# Altium PCB PCB1.PcbDoc
Units mm, origin at the board's own origin, x right, y up, seen from the top; angles counter-clockwise.
Board outline 72.14 x 75.57 mm, 2 copper layers (Top Layer, Bottom Layer); 21 components, 20 nets, 95 pads, 10 vias.
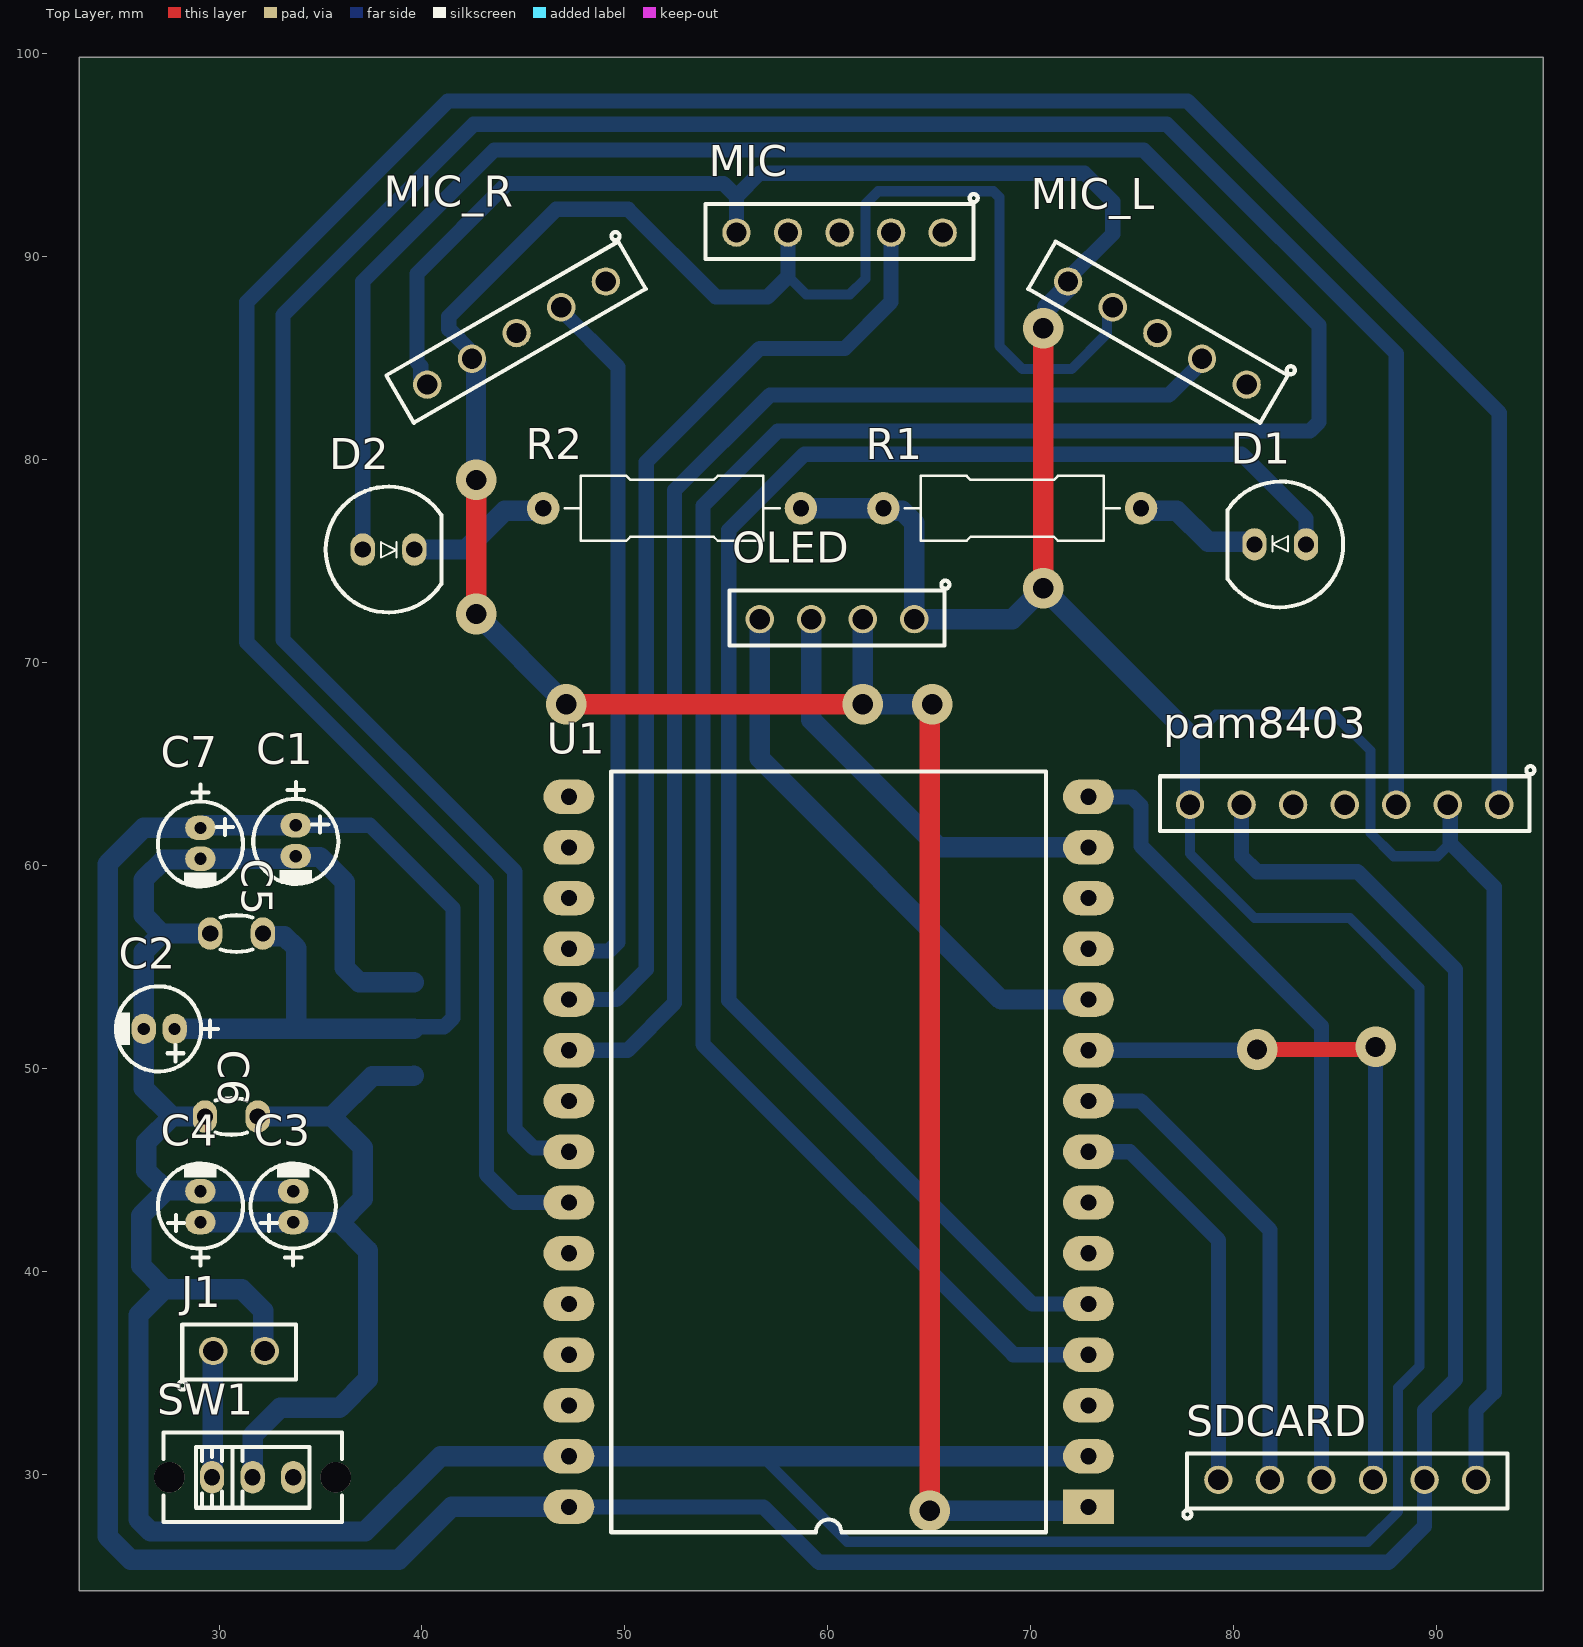
[diagram p0: Top Layer view]
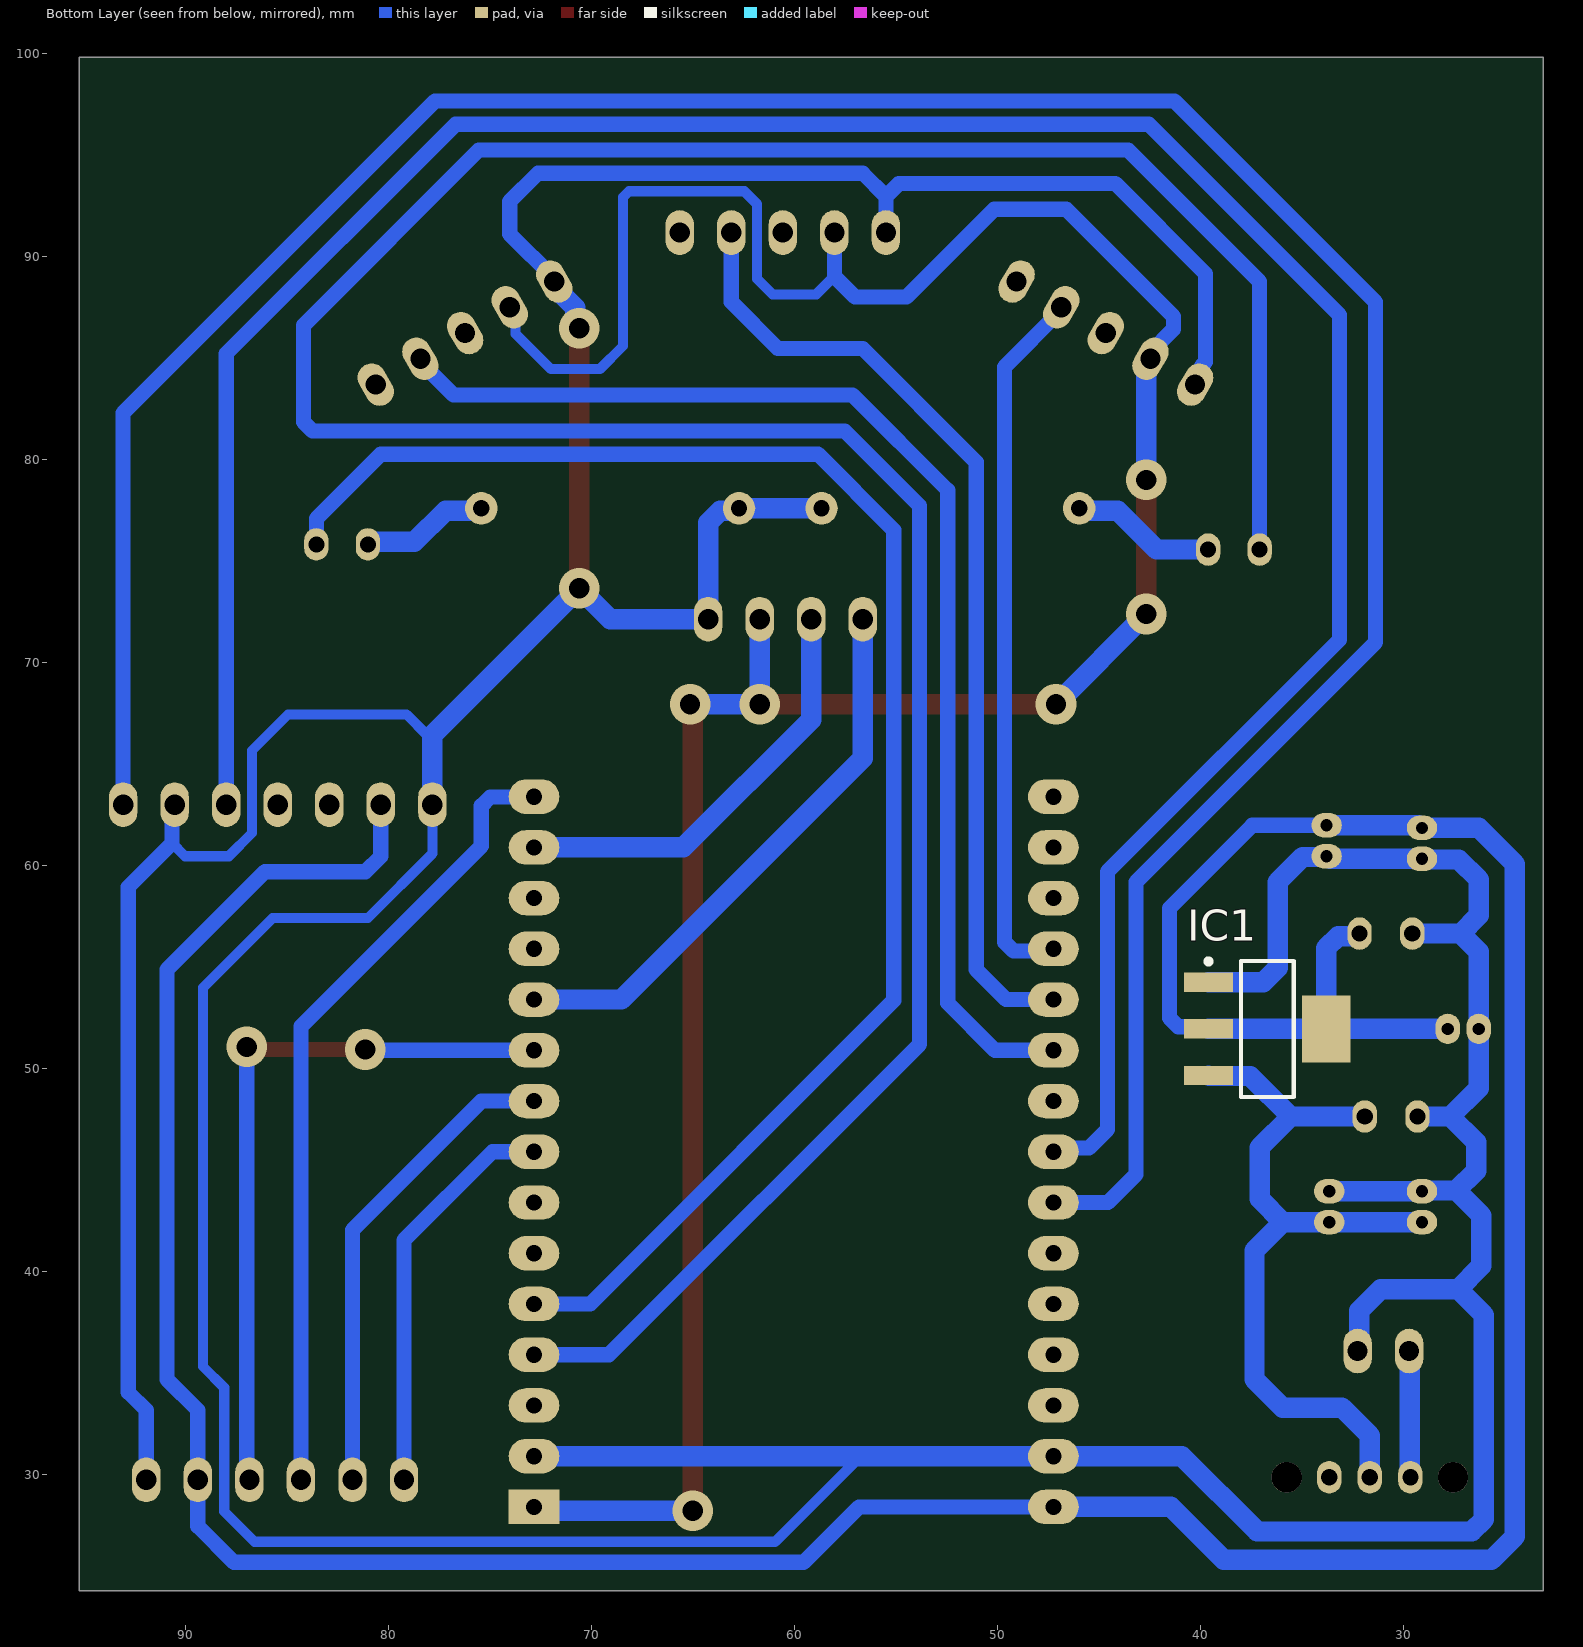
[diagram p1: Bottom Layer view, seen from below]

## Layer stack, top to bottom
Top Solder: solder mask 0.0102, Solder Resist, Dk 3.5
Top Layer: signal copper 0.0356
Dielectric 1: dielectric 0.32, FR-4, Dk 4.8
Bottom Layer: signal copper 0.0356
Bottom Solder: solder mask 0.0102, Solder Resist, Dk 3.5

## Board outline
23.114,24.257 25.527,24.257 95.25,24.257 95.25,99.822 23.114,99.822

## Design rules (kind name [scope] priority, off if disabled: settings)
Clearance [All] p1: gap=0.254 ignorepadtopadclearanceinfootprint=FALSE except(0: Arc-Hole Track-Hole SMDPad-Hole THPad-Hole Via-Hole Fill-Hole Poly-Hole Region-Hole Text-Hole)
PolygonConnect [All] p1: connectstyle=Relief reliefconductorwidth=0.254 reliefentries=4 polygonreliefangle="90 Angle" airgapwidth=0.254
RoutingVias [All] p1: holewidth=0.711 width=1.27 viastyle="Through Hole" minholewidth=0.711 minwidth=1.27 maxholewidth=0.711 maxwidth=1.27
SolderMaskExpansion [All] p1: expansion=0.102 istentingtop=FALSE
Width [All] p1: maxlimit=1 minlimit=0.5 preferedwidth=0.75
30 further rules are at their usual default settings.

## Components (designator, comment, footprint, x,y, rotation, side; value= is the part's Value field where it differs from the comment)
C1 "100uF" C_EL_4X7 33.782,61.214 r270 top
C2 "10uF" C_EL_4X7 27.051,51.943 r180 top
C3 "100uF" C_EL_4X7 33.655,43.18 r90 top
C4 "100uF" C_EL_4X7 29.083,43.18 r90 top
C5 "100nF" C_CER_D3 30.861,56.642 r0 top
C6 "100nF" C_CER_D3 30.607,47.625 r0 top
C7 "1uF" C_EL_4X7 29.083,61.087 r270 top
D1 "LED5MM_RED" LED5MM_RED 82.296,75.819 r180 top
D2 "LED5MM_GREEN" LED5MM_GRN 38.354,75.565 r0 top
IC1 "IC_AMS1117-5.0" SOT223-4N 36.703,51.943 r180 bottom
J1 "Power" HDR_F_1X2 30.988,36.068 r0 top value=HDRF2
MIC "HDRF5" HDR_F_1X5 60.579,91.186 r180 top
MIC_L "HDRF5" HDR_F_1X5 76.241,86.233 r150 top
MIC_R "HDRF5" HDR_F_1X5 44.663,86.233 r210 top
OLED "HDRF4" HDR_F_1X4 60.452,72.136 r180 top
pam8403 "HDRF7" HDR_F_1X7 85.471,62.992 r180 top
R1 "1K" "Axial 0_5W 5_0mm" 69.088,77.597 r0 top
R2 "1K" "Axial 0_5W 5_0mm" 52.324,77.597 r180 top
SDCARD "HDRF6" HDR_F_1X6 85.598,29.718 r0 top
SW1 "SlideSwitch" SWSLIDT_SPDT_S_8X4 31.655,29.845 r180 top
U1 "esp32_devkit" esp32_devkit 72.844,28.387 r180 top

## Footprints (in the part's own frame and the unit in brackets; to place one, negate y for a bottom-side part, rotate by r counter-clockwise, add the part's x,y. Pads: shape width x height; smd on the part's side, far side on the other; paste and mask are expansions set on the pad)
"Axial 0_5W 5_0mm" [mm] "Designer Abbas Basereh"
  round 1.6 hole 0.8: 1(6.35,0) 2(-6.35,0)
  silkscreen extent -5.3,-1.6 5.3,1.6, body extent -6.7,-1.65 6.7,1.65, height 4.02
C_CER_D3 [mm] "CAP, CER MULTILAYER, D:3.5mm, pitch: 2.54mm"
  oval 1.2x1.6 hole 0.8: 1(-1.3,0) 2(1.3,0)
  silkscreen extent -0.78,-0.9 0.78,0.9, body extent -1.75,-0.75 1.75,0.75, height 4
C_EL_4X7 [mm] "Cap Elec, D4.0X7.0H pitch: 1.5mm"
  oval 1.2x1.5 hole 0.6: 1(-0.762,0) 2(0.762,0)
  silkscreen extent -2.9,-2.1 2.13,2.1, body extent -2,-2 2,2, height 1
esp32_devkit [mm]
  rect 2.5x1.7 hole 0.8: 1(0,0)
  oval 2.5x1.7 hole 0.8: 2(0,-2.5) 3(0,-5) 4(0,-7.5) 5(0,-10) 6(0,-12.5) 7(0,-15) 8(0,-17.5) 9(0,-20) 10(0,-22.5) 11(0,-25) 12(0,-27.5) 13(0,-30) 14(0,-32.5) 15(0,-35) 16(25.6,-35) 17(25.6,-32.5) 18(25.6,-30) 19(25.6,-27.5) 20(25.6,-25) 21(25.6,-22.5) 22(25.6,-20) 23(25.6,-17.5) 24(25.6,-15) 25(25.6,-12.5) 26(25.6,-10) 27(25.6,-7.5) 28(25.6,-5) 29(25.6,-2.5) 30(25.6,0)
  silkscreen extent 2.08,-36.25 23.51,1.25
HDR_F_1X2 [mm] "HEADER FEMALE pitch: 2.54mm"
  round 1.4 / inner round 1.4 / far side oval 1.4x2.2 hole 1 mask+0.1: 1(-1.27,0) 2(1.27,0)
  silkscreen extent -3,-1.9 2.8,1.3, body extent -2.66,-1.3 2.67,1.2, height 8.5
HDR_F_1X4 [mm] "HEADER FEMALE pitch: 2.54mm"
  round 1.4 / inner round 1.4 / far side oval 1.4x2.2 hole 1 mask+0.1: 1(-3.81,0) 2(-1.27,0) 3(1.27,0) 4(3.81,0)
  silkscreen extent -5.54,-1.9 5.3,1.3, body extent -5.2,-1.3 5.21,1.2, height 8.5
HDR_F_1X5 [mm] "HEADER FEMALE pitch: 2.54mm"
  round 1.4 / inner round 1.4 / far side oval 1.4x2.2 hole 1 mask+0.1: 1(-5.08,0) 2(-2.54,0) 3(0,0) 4(2.54,0) 5(5.08,0)
  silkscreen extent -6.81,-1.9 6.6,1.3, body extent -6.47,-1.3 6.48,1.2, height 8.5
HDR_F_1X6 [mm] "HEADER FEMALE pitch: 2.54mm"
  round 1.4 / inner round 1.4 / far side oval 1.4x2.2 hole 1 mask+0.1: 1(-6.35,0) 2(-3.81,0) 3(-1.27,0) 4(1.27,0) 5(3.81,0) 6(6.35,0)
  silkscreen extent -8.08,-1.9 7.9,1.3, body extent -7.74,-1.3 7.75,1.2, height 8.5
HDR_F_1X7 [mm] "HEADER FEMALE pitch: 2.54mm"
  round 1.4 / inner round 1.4 / far side oval 1.4x2.2 hole 1 mask+0.1: 1(-7.62,0) 2(-5.08,0) 3(-2.54,0) 4(0,0) 5(2.54,0) 6(5.08,0) 7(7.62,0)
  silkscreen extent -9.35,-1.9 9.1,1.3, body extent -9.01,-1.3 9.02,1.2, height 8.5
LED5MM_GRN [mm] "LED 5MM THROUGH HOLE GREEN-Designer Abbas Basereh"
  oval 1.2x1.6 hole 0.8: 1(-1.27,0) 2(1.27,0)
  silkscreen extent -3.1,-3.1 2.6,3.1, body extent -3,-3 2.5,3, height 9.14
LED5MM_RED [mm] "LED 5MM THROUGH HOLE RED-Designer Abbas Basereh"
  oval 1.2x1.6 hole 0.8: 1(-1.27,0) 2(1.27,0)
  silkscreen extent -3.1,-3.1 2.6,3.1, body extent -3,-3 2.5,3, height 9.14
SOT223-4N [mm] "SOT223, 4-Leads, Body 6.7x7.3mm (max), Pitch 2.30mm, IPC Medium Density"
  rect 2.4x0.95 smd: 1(-2.9,2.3) 2(-2.9,0) 3(-2.9,-2.3)
  rect 2.4x3.3 smd: 4(2.9,0)
  silkscreen extent -3.03,-3.35 1.3,3.45, body extent -3.48,-3.25 3.48,3.25, height 1.68
SWSLIDT_SPDT_S_8X4 [mm] "Switch, Slide, SPDT, Straight, THD, 8.6X4.3mm"
  oval 1.2x1.6 hole 0.8: 1(-2,0) 2(0,0) 3(2,0)
  round 1.5 hole 1.5 unplated: ""(-4.1,0) ""(4.1,0)
  silkscreen extent -4.4,-2.2 4.4,2.2, body extent -4.3,-2.15 4.3,2.15, height 8.8

## Part data
C1 C2 C3 C4 C7: library part CAP_THD_EL_4X7, "CAP, THD, ELEC,", ASSEMBLY=ASSEMBLY, DESC=DESCRIPTION, DIST#=MOUSER, MANF=MANF, MANF_P#=MANF_PART#, PARAM=20%, PARAM2=25V, PRICE="10= 5$"
C5 C6: library part CAP_THD_CERML, "CAP, THD, CER MULTI LAYER,", ASSEMBLY=ASSEMBLY, DESC="CAP, CER MULTI LAYER,", MANF=MANF, MANF_P#=MANF_PART#, PARAM2=50V, PRICE="100= 1$"
D1 D2: library part LED5MM, "LED LIGHTING", Data=16-12-2016, Designer="Abbas Basereh"
IC1: "800mA LOW DROPOUT VOLTAGE REGULATOR", Manufacturer="Advanced Monolithic Systems, Inc.", Operating Temperature="-55 ~ +125 (C)", Category="Integrated Circuit", Code_IPC=SOT-223, Company="SJ Libraries", ComponentLink1Description=Datasheet, ComponentLink1URL=http://www.advanced-monolithic.com/pdf/ds1117.pdf, ComponentLink2Description=Reference, ComponentLink2URL=http://www.advanced-monolithic.com/index.html, Designer="Eng. Saeid Jorablo", ESD Sensetive=True/False, HelpURL=http://s3.picofile.com/file/7443264187/Coming_Soon_logo.gif, Mounting Technology="Surface Mount", PackageDescription="SOT223, 4-Leads, Body 6.7x7.3mm (max), Pitch 2.30mm", PinCount=4, RoHS compliant=True/False, Status=Unrelease, Update=6/5/2012
J1: library part HDR_F_1X2, "CONN, HEADER, Female, pitch: 2.54mm, 2POS"
MIC MIC_L MIC_R: library part HDR_F_1X5, "CONN, HEADER, Female, pitch: 2.54mm, 5POS"
OLED: library part HDR_F_1X4, "CONN, HEADER, Female, pitch: 2.54mm, 4POS"
pam8403: library part HDR_F_1X7, "CONN, HEADER, Female, pitch: 2.54mm, 7POS"
R1 R2: library part "RES Axial 0.5W", "RES Axial 0.5W", Data=4-1-2017, Desc.="RES Axial 0.5W", Designer="Abbas Basereh"
SDCARD: library part HDR_F_1X6, "CONN, HEADER, Female, pitch: 2.54mm, 6POS"
SW1: library part SWSLIDT_SPDT_S_8X4, "SWITCH, SLIDE, SPDT, 8.6X4.3mm, THD", ASSEMBLY=ASSEMBLY, DESC=DESCRIPTION, MANF=C&K, MANF_PART#=OS102011MS2QN1, PARAM=PARAM, PRICE=0.4$

## Via types
v1: diameter 2, hole 1, Top Layer to Bottom Layer, 10 vias

## Nets (pads, with @x,y where several pads share a name; then routed paths per layer and width w, separated by ;. In a path a pad name is that pad's centre, name@x,y a point inside that pad or via, vN(x,y) a via of type N, cw(c..) or ccw(c..) an arc to the next point about the centre after c; other vN are vias at no path point)
3v3: MIC.4 MIC_L.4 MIC_R.4 OLED.2 U1.1 | length 145.1
  Top Layer w1: v1(42.672,72.39) v1(42.672,78.994) ; v1(47.117,67.945) v1(61.722,67.945) ; v1(65.024,28.194) 65.024,67.818 v1(65.151,67.945)
  Bottom Layer w0.5: 58.039,89.027 58.928,88.138 61.087,88.138 61.849,88.9 61.849,92.583 62.484,93.218 68.16,93.218 68.453,92.925 68.453,85.598 69.596,84.455 72.009,84.455 73.75,86.196 73.75,87.212 MIC_L.4
  Bottom Layer w0.75: MIC_R.4 42.464,85.285 41.325,86.424 41.325,87.045 46.609,92.329 50.165,92.329 54.483,88.011 57.023,88.011 58.039,89.027 MIC.4
  Bottom Layer w1: MIC_R.4 42.672,84.755 42.668,84.75 42.668,78.998 v1(42.672,78.994) ; v1(42.672,72.39) v1(47.117,67.945) ; OLED.2 v1(61.722,67.945) v1(65.151,67.945) ; v1(65.024,28.194) 72.651,28.194 U1.1
5v: C1.1 C2.1 C5.2 C7.1 IC1.2 IC1.4 pam8403.6 SDCARD.5 U1.30 | length 189.7
  Bottom Layer w0.75: C1.1 37.442,61.976 41.529,57.889 41.529,52.482 41.09,52.043 39.703,52.043 IC1.2 ; U1.30 56.83,28.387 59.563,25.654 87.63,25.654 89.408,27.432 SDCARD.5 89.408,33.147 90.932,34.671 90.932,54.864 86.106,59.69 81.153,59.69 80.391,60.452 pam8403.6
  Bottom Layer w1: C2.1 IC1.4 ; C5.2 32.161,56.607 32.253,56.515 33.217,56.515 33.803,55.929 IC1.4 ; C1.1 29.264,61.976 29.137,61.849 C7.1 26.289,61.849 24.511,60.071 24.511,26.924 25.654,25.781 38.862,25.781 41.468,28.387 U1.30 ; IC1.2 IC1.4
CS: SDCARD.1 U1.8 | length 20
  Bottom Layer w0.75: U1.8 74.89,45.887 79.248,41.529 SDCARD.1
GND: C1.2 C2.2 C3.2 C4.2 C5.1 C6.1 C7.2 IC1.1 J1.2 MIC.5 MIC_L.5 MIC_R.5 OLED.1 pam8403.2 pam8403.7 R1.2 R2.2 SDCARD.6 U1.2 U1.29 | length 346.8
  Top Layer w1: v1(70.612,73.66) v1(70.612,86.467)
  Bottom Layer w0.5: 56.743,30.887 60.96,26.67 86.614,26.67 88.107,28.163 88.107,34.259 89.154,35.306 89.154,53.975 85.725,57.404 81.026,57.404 77.851,60.579 pam8403.7 ; 77.851,66.421 78.105,66.421 79.121,67.437 84.963,67.437 86.741,65.659 86.741,61.595 87.884,60.452 90.038,60.452 90.675,61.09
  Bottom Layer w0.75: MIC_R.5 39.94,84.017 39.94,84.615 39.751,84.804 39.751,89.154 44.196,93.599 54.864,93.599 55.499,92.964 ; MIC.5 55.499,92.964 ; MIC_L.5 71.841,88.919 74.041,91.119 74.041,92.71 72.644,94.107 56.642,94.107 55.499,92.964 ; pam8403.2 90.675,62.868 90.675,61.09 92.837,58.928 92.837,34.036 91.948,33.147 SDCARD.6
  Bottom Layer w1: C6.1 27.686,47.625 ; C5.1 27.178,56.642 ; J1.2 32.181,36.145 32.181,38.05 31.115,39.116 27.305,39.116 ; C3.2 C4.2 29.045,43.98 27.394,43.98 ; IC1.1 36.908,54.243 36.195,54.956 36.195,59.182 34.963,60.414 33.82,60.414 C1.2 33.728,60.452 33.601,60.325 C7.2 29.045,60.287 27.267,60.287 26.289,59.309 26.289,57.531 27.178,56.642 ; R2.2 R1.2 62.853,77.482 63.676,77.482 64.262,76.896 OLED.1 69.088,72.136 v1(70.612,73.66) 77.851,66.421 pam8403.7 ; v1(70.612,86.467) 70.803,86.658 70.803,87.48 71.841,88.518 MIC_L.5 ; U1.2 56.743,30.887 U1.29 40.92,30.887 37.211,27.178 26.621,27.178 26.035,27.764 26.035,37.846 27.305,39.116 ; 27.178,56.642 26.289,55.753 C2.2 26.289,49.022 27.686,47.625 ; 27.305,39.116 26.162,40.259 26.162,42.749 27.394,43.98 ; 27.394,43.98 26.416,44.958 26.416,46.355 27.686,47.625
LeftSpeaker: pam8403.1 U1.24 | length 144
  Bottom Layer w0.75: U1.24 44.555,43.387 43.18,44.762 43.18,59.182 31.369,70.993 31.369,87.757 41.275,97.663 77.724,97.663 93.091,82.296 pam8403.1
MISO: SDCARD.4 U1.10 | length 35.6
  Top Layer w0.75: v1(81.153,50.927) 86.868,50.927 v1(86.995,51.054)
  Bottom Layer w0.75: U1.10 81.113,50.887 v1(81.153,50.927) ; SDCARD.4 86.995,29.845 v1(86.995,51.054)
MOSI: SDCARD.3 U1.15 | length 39.7
  Bottom Layer w0.75: U1.15 72.858,63.373 74.999,63.373 75.438,62.934 75.438,60.96 84.328,52.07 SDCARD.3
NetD1_1: D1.1 U1.5 | length 79.7
  Bottom Layer w0.75: U1.5 70.071,38.387 55.118,53.34 55.118,76.535 58.847,80.264 80.391,80.264 83.566,77.089 D1.1
NetD1_2: D1.2 R1.1 | length 6.3
  Bottom Layer w1: R1.1 75.553,77.482 77.204,77.482 78.74,75.946 80.934,75.946 81.026,75.854 D1.2
NetD2_1: D2.1 U1.4 | length 155.3
  Bottom Layer w0.75: D2.1 37.084,88.773 43.561,95.25 75.565,95.25 84.201,86.614 84.201,81.846 83.762,81.407 57.531,81.407 53.848,77.724 53.848,51.181 69.142,35.887 U1.4
NetD2_2: D2.2 R2.1 | length 7.2
  Bottom Layer w1: D2.2 42.164,75.565 44.081,77.482 45.859,77.482 R2.1
NetJ1_1: J1.1 SW1.3 | length 6.2
  Bottom Layer w1: SW1.3 29.686,29.877 29.686,36.036 J1.1
OUT: MIC.2 U1.20 | length 48.2
  Bottom Layer w0.75: U1.20 49.577,53.387 51.054,54.864 51.054,79.883 56.642,85.471 60.833,85.471 63.119,87.757 MIC.2
OUT_L: MIC_L.2 U1.21 | length 60.2
  Bottom Layer w0.75: U1.21 50.125,50.887 52.451,53.213 52.451,78.486 57.15,83.185 76.809,83.185 78.44,84.817 MIC_L.2
OUT_R: MIC_R.2 U1.19 | length 35.1
  Bottom Layer w0.75: MIC_R.2 46.863,87.357 49.657,84.563 49.657,56.217 49.218,55.778 47.353,55.778 U1.19
RightSpeaker: pam8403.3 U1.23 | length 133.7
  Bottom Layer w0.75: U1.23 47.062,46.069 45.498,46.069 44.577,46.99 44.577,59.69 33.147,71.12 33.147,87.122 42.545,96.52 76.708,96.52 88.011,85.217 pam8403.3
SCK: SDCARD.2 U1.9 | length 23.9
  Bottom Layer w0.75: U1.9 75.438,48.387 81.788,42.037 SDCARD.2
SCL: OLED.3 U1.14 | length 21.2
  Bottom Layer w1: OLED.3 59.182,67.183 65.478,60.887 U1.14
SDA: OLED.4 U1.11 | length 28
  Bottom Layer w1: OLED.4 56.642,65.278 68.533,53.387 U1.11
Vin: C3.1 C4.1 C6.2 IC1.3 SW1.2 | length 38.9
  Bottom Layer w1: C4.1 C3.1 35.941,42.418 ; SW1.2 31.655,31.909 33.02,33.274 35.941,33.274 37.338,34.671 37.338,41.021 35.941,42.418 ; C6.2 35.56,47.625 ; IC1.3 39.578,49.618 37.553,49.618 35.56,47.625 ; 35.56,47.625 37.084,46.101 37.084,43.561 35.941,42.418
pads on no net: MIC.1 MIC.3 MIC_L.1 MIC_L.3 MIC_R.1 MIC_R.3 pam8403.4 pam8403.5 SW1. SW1.1 U1.3 U1.6 U1.7 U1.12 U1.13 U1.16 U1.17 U1.18 U1.22 U1.25 U1.26 U1.27 U1.28

## Silkscreen, mask and mechanical layers (free items; w line width, h text height)
Mechanical 1:
  lines w0.254: 23.114,24.257 95.25,24.257 95.25,99.822 23.114,99.822 23.114,24.257
  text "Raymon /        AI-BOT" at 33.039,107.838 h2.1 r90